# Altium PCB Invertor_1.PcbDoc
Units mm, origin at the board's own origin, x right, y up, seen from the top; angles counter-clockwise.
Board outline 152.4 x 93.73 mm, 2 copper layers (Top Layer, Bottom Layer); 110 components, 60 nets, 328 pads, 0 vias.
Unrouted connection lines stored in the file: 237.
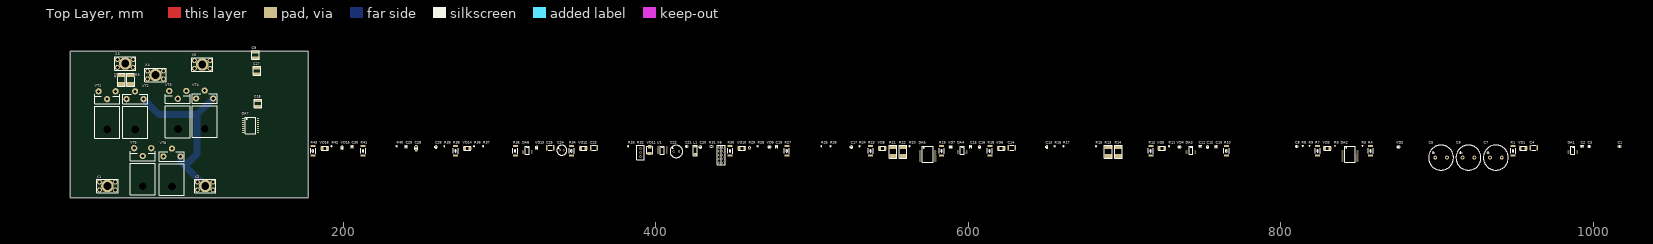
[diagram p0: Top Layer view]
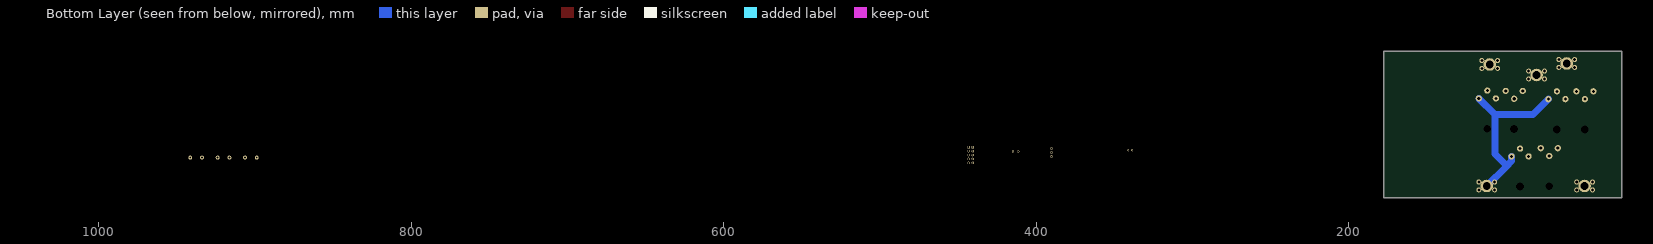
[diagram p1: Bottom Layer view, seen from below]

## Layer stack, top to bottom
Top Solder: solder mask 0.0102, Solder Resist, Dk 3.5
Top Layer: signal copper 0.0356
Dielectric 1: dielectric 0.32, FR-4, Dk 4.8
Bottom Layer: signal copper 0.0356
Bottom Solder: solder mask 0.0102, Solder Resist, Dk 3.5

## Board outline
25.4,25.4 177.8,25.4 177.8,119.126 25.4,119.126

## Design rules (kind name [scope] priority, off if disabled: settings)
Clearance Clearance_1 [InNetClass('Transistor')] p1: gap=1 ignorepadtopadclearanceinfootprint=FALSE
Clearance [All] p2: gap=0.254 ignorepadtopadclearanceinfootprint=FALSE except(0.127: SMDPad-SMDPad; 0.2: Track-Track)
ComponentClearance [All] p1 off: gap=0.254 collisioncheckmode=3 verticalgap=0.254 showdistances=FALSE
Height [All] p1 off: minheight=0 maxheight=25.4 prefheight=12.7
PlaneConnect [All] p1: planeconnectstyle=Direct reliefexpansion=0.508 reliefentries=4 reliefconductorwidth=0.254 reliefairgap=0.254
PolygonConnect [All] p1: connectstyle=Direct reliefconductorwidth=0.254 reliefentries=4 polygonreliefangle="90 Angle" airgapwidth=0.254
RoutingVias [All] p1: holewidth=0.711 width=1.27 viastyle="Through Hole" minholewidth=0.2 minwidth=0.4 maxholewidth=0.711 maxwidth=1.27
SolderMaskExpansion [All] p1: expansion=0.102 istentingtop=FALSE
Width [All] p1: maxlimit=20 minlimit=0.2 preferedwidth=0.254
27 further rules are at their usual default settings.

## Components (designator, comment, footprint, x,y, rotation, side; value= is the part's Value field where it differs from the comment)
C1 "Capacitor" 0805 1016.635,58.42 r0 top value="0.1 мкФ"
C2 "Capacitor" C0603C 992.632,58.547 r0 top value="0.1 мкФ"
C3 "Capacitor" 0805 997.204,58.42 r0 top value="10 мкФ"
C4 "Capacitor" 1812С 961.771,57.531 r0 top value="2.2 мкФ"
C5 "Сapacitor pol" CAP-10 902.462,51.181 r0 top value=470мкФ
C6 "Сapacitor pol" CAP-10 919.988,51.181 r0 top value=470мкФ
C7 "Сapacitor pol" CAP-10 937.514,51.181 r0 top value=470мкФ
C8 "Capacitor" 0805 810.133,58.42 r0 top value="0.47 мкФ"
C9 "Capacitor" 2220С 144.018,116.84 r270 top value="4.7 мкФ"
C10 "Capacitor" C0603C 758.571,58.166 r90 top value="0.1 мкФ"
C11 "Capacitor" C0603C 748.284,58.547 r0 top value="0.1 мкФ"
C12 "Capacitor" 0805 753.11,57.912 r90 top value="10 мкФ"
C13 "Capacitor" 0805 650.24,57.912 r90 top value="0.1 мкФ"
C14 "Capacitor" 1812С 627.888,57.531 r0 top value="2.2 мкФ"
C15 "Capacitor" C0603C 601.599,58.166 r90 top value="0.1 мкФ"
C16 "Capacitor" 0805 607.314,57.912 r90 top value="10 мкФ"
C17 "Capacitor" 0805 525.272,57.912 r90 top value="0.47 мкФ"
C18 "Capacitor" 2220С 145.669,85.725 r270 top value="4.7 мкФ"
C19 "Capacitor" C0603C 477.393,58.166 r90 top value="0.1 мкФ"
C20 "" C0805C 428.752,57.912 r90 top value=10nF
C21 "Capacitor" 0805 419.862,58.42 r0 top value="0.1 мкФ"
C22 "" CAP-8x12 413.258,55.118 r0 top value=220uF
C23 "Capacitor" 1812С 360.553,57.531 r0 top value="2.2 мкФ"
C24 "" CAP-К50-35 339.979,55.88 r0 top value=22uF
C25 "" C1812C 332.613,57.531 r0 top value=2.2uF
C26 "Capacitor" 0805 259.461,57.912 r90 top value="0.47 мкФ"
C27 "Capacitor" 2220С 145.034,106.68 r90 top value="4.7 мкФ"
C28 "Capacitor" C1206C 246.761,57.15 r90 top value=1нф
C29 "Capacitor" C0603C 240.538,58.166 r90 top value="0.1 мкФ"
C30 "Capacitor" C0603C 205.994,58.166 r90 top value="0.1 мкФ"
DA1 "AD623ARZ" SO8 986.79,55.88 r0 top
DA2 "IR2010SPFB" SOIC16 844.169,53.34 r0 top
DA3 "AD623ARZ" SO8 742.442,55.88 r0 top
DA4 "AD623ARZ" SO8 596.138,55.88 r0 top
DA5 "IR2010SPFB" SOIC16 574.04,53.34 r0 top
DA6 "LM393DT" SO8 317.881,55.88 r0 top
DA7 "IR2010SPFB" SOIC16 140.843,71.755 r0 top
L1 "" IND0488-G-E 425.323,53.34 r90 top value=22uH
R1 "Resistor" 2512R 948.563,55.499 r90 top value=100Ом
R2 "Resistor" 2816R 58.293,101.092 r90 top value=20мОм
R3 "Resistor" 2816R 64.135,101.092 r90 top value=20мОм
R4 "Resistor" 2512R 857.377,55.499 r90 top value=43Ом
R5 "Resistor" 0402R 852.17,58.801 r0 top value=11кОм
R6 "Resistor" 0402R 834.644,58.801 r0 top value=10кОм
R7 "Resistor" 2512R 823.468,55.499 r90 top value=20Ом
R8 "Resistor" 0402R 813.943,58.801 r0 top value=20кОм
R9 "Resistor" 0402R 818.261,58.801 r0 top value=10кОм
R10 "Resistor" 2512R 765.175,55.499 r90 top value=43Ом
R11 "Resistor" 0402R 728.472,58.42 r90 top value=10кОм
R12 "Resistor" 2512R 716.788,55.499 r90 top value=20Ом
R13 "Resistor" 2816R 689.61,54.991 r90 top value=20мОм
R14 "Resistor" 2816R 696.087,54.991 r90 top value=20мОм
R15 "Resistor" 0402R 681.736,58.42 r90 top value=11кОм
R16 "Resistor" 0402R 655.447,58.42 r90 top value=10кОм
R17 "Resistor" 0402R 661.035,58.42 r90 top value=10кОм
R18 "Resistor" 2512R 613.791,55.499 r90 top value=100Ом
R19 "Resistor" 2512R 582.93,55.499 r90 top value=43Ом
R20 "Resistor" 0402R 562.483,58.42 r90 top value=10кОм
R21 "Resistor" 2816R 551.815,54.991 r90 top value=20мОм
R22 "Resistor" 2816R 558.292,54.991 r90 top value=20мОм
R23 "Resistor" 2512R 537.591,55.499 r90 top value=20Ом
R24 "Resistor" 0402R 530.479,58.42 r90 top value=11кОм
R25 "Resistor" 0402R 506.095,58.42 r90 top value=10кОм
R26 "Resistor" 0402R 511.937,58.42 r90 top value=10кОм
R27 "Resistor" 2512R 483.997,55.499 r90 top value=43Ом
R28 "Resistor" 0402R 465.455,58.42 r90 top value=10кОм
R29 "" C0805R 460.121,57.531 r90 top value=1.1k
R30 "Resistor" 2512R 447.675,55.499 r90 top value=20Ом
R31 "" C0805R 435.737,58.42 r0 top value=9.1k
R32 "pot" 3296W 390.398,54.483 r90 top
R33 "Resistor" 0402R 382.524,58.42 r90 top value=75кОм
R34 "Resistor" 2512R 346.202,55.499 r90 top value=100Ом
R35 "Resistor" 2512R 310.261,55.499 r90 top value=43Ом
R36 "Resistor" 0402R 283.972,58.42 r90 top value=10кОм
R37 "Resistor" 0402R 289.814,58.42 r90 top value=2.2кОм
R38 "Resistor" 2512R 272.034,55.499 r90 top value=20Ом
R39 "Resistor" 0402R 264.922,58.42 r90 top value=2.2кОм
R40 "Resistor" 0402R 234.442,58.42 r90 top value=2.2кОм
R41 "Resistor" 2512R 212.852,55.499 r90 top value=43Ом
R42 "Resistor" 0402R 192.786,58.42 r90 top value=10кОм
R43 "Resistor" 2512R 180.848,55.499 r90 top value=20Ом
U1 "LM22675MR-5.0" LM22675MR-5.0/NOPB 404.368,55.753 r0 top
VD1 "STPS2H100A" D0-124AC 954.913,57.15 r0 top
VD2 "BZX384-C18" SOD323 875.284,58.039 r0 top
VD3 "VS-10BQ040" D0-124AC 829.691,57.15 r0 top
VD4 "BZX384-C18" SOD323 735.076,58.039 r0 top
VD5 "VS-10BQ040" D0-124AC 723.9,57.15 r0 top
VD6 "STPS2H100A" D0-124AC 621.03,57.15 r0 top
VD7 "BZX384-C18" SOD323 588.772,58.039 r0 top
VD8 "VS-10BQ040" D0-124AC 545.084,57.15 r0 top
VD9 "BZX384-C18" SOD323 472.821,58.039 r0 top
VD10 "VS-10BQ040" D0-124AC 455.168,57.15 r0 top
VD11 "" DO-214AA 396.24,56.007 r90 top
VD12 "STPS2H100A" D0-124AC 353.695,57.15 r0 top
VD13 "BZX384-C18" SOD323 323.977,57.531 r90 top
VD14 "VS-10BQ040" D0-124AC 279.527,57.15 r0 top
VD15 "BZX384-C18" SOD323 199.517,57.531 r90 top
VD16 "VS-10BQ040" D0-124AC 188.341,57.15 r0 top
VT1 "IRFP4710PBF" TO247-2 49.099,88.565 r180 top
VT2 "IRFP4710PBF" TO247-1 67.006,88.565 r180 top
VT3 "IRFP4710PBF" TO247-2 94.311,88.819 r180 top
VT4 "IRFP4710PBF" TO247-1 111.506,89.027 r180 top
VT5 "IRFP4710PBF" TO247-2 71.882,52.197 r180 top
VT6 "IRFP4710PBF" TO247-1 90.54,51.943 r180 top
X1 "Connector-1" PCBM4 49.276,33.02 r180 top
X2 "Connector-1" PCBM4 111.887,33.02 r180 top
X3 "Connector-1_1" PCBM4 60.706,111.379 r0 top
X4 "Connector-1_1" PCBM4 80.01,104.013 r0 top
X5 "Connector-1_1" PCBM4 109.982,110.744 r180 top
X6 "PLS-2x5" PLS-2x5 443.357,52.832 r90 top

## Footprints (in the part's own frame and the unit in brackets; to place one, negate y for a bottom-side part, rotate by r counter-clockwise, add the part's x,y. Pads: shape width x height; smd on the part's side, far side on the other; paste and mask are expansions set on the pad)
0402R [mm]
  rect 0.4x0.6 smd: 1(-0.5,0) 2(0.5,0)
  silkscreen extent -0.2,-0.3 0.2,0.3, body extent -0.52,-0.3 0.52,0.3, height 0.34
0805 [mm]
  rect 0.6x1.3 smd: 1(-0.875,0) 2(0.875,0)
  silkscreen extent -0.4,-0.7 0.4,0.7, body extent -1,-0.6 1,0.6, height 0.8
1812С [mm]
  rect 1x3.35 smd: 1(-2.175,0) 2(2.175,0)
  silkscreen extent -1.3,-1.58 1.3,1.58, body extent -2.25,-1.6 2.25,1.6, height 1
2220С [mm]
  rect 1.8x5 smd: 1(-1.9,0) 2(1.9,0)
  silkscreen extent -2.8,-2.5 2.8,2.5
2512R [mm]
  rect 1.2x3.2 smd: 1(-3,0) 2(3,0)
  silkscreen extent -1.73,-1.63 1.75,1.63, body extent -3.2,-1.6 3.2,1.6, height 0.55
2816R [mm]
  rect 2.45x4.7 smd: 1(-2.825,0) 2(2.825,0)
  silkscreen extent -4.2,-2.5 4.2,2.5
3296W [mm]
  round 1.5 hole 0.8: 1(2.54,0) 2(0,0) 3(-2.54,0)
  silkscreen extent -4.77,-2.45 4.72,2.37, body extent -4.77,-2.43 4.76,2.4, height 11.52
C0603C [mm]
  rect 0.5x0.8 smd: 1(-0.7,0) 2(0.7,0)
  silkscreen extent -0.97,-0.58 0.97,0.58, body extent -0.8,-0.4 0.8,0.4, height 0.5
C0805C [mm]
  rect 0.6x1.3 smd: 1(-0.875,0) 2(0.875,0)
  silkscreen extent -0.4,-0.7 0.4,0.7, body extent -1,-0.6 1,0.6, height 0.8
C0805R [mm]
  rect 0.6x1.3 smd: 1(-0.875,0) 2(0.875,0)
  silkscreen extent -0.4,-0.7 0.4,0.7, body extent -1,-0.6 1,0.6, height 0.5
C1206C [mm]
  rect 0.8x1.7 smd: 1(-1.6,0) 2(1.6,0)
  silkscreen extent -1,-0.9 1,0.9, body extent -1.7,-0.8 1.7,0.8, height 0.8
C1812C [mm]
  rect 1x3.35 smd: 1(-2.175,0) 2(2.175,0)
  silkscreen extent -1.3,-1.58 1.3,1.58, body extent -2.25,-1.6 2.25,1.6, height 1
CAP-8x12 [mm]
  round 1.3 hole 0.8: 1(-1.75,0) 2(1.75,0)
  silkscreen extent -4,-4 4,4
CAP-10 [mm]
  round 2.5 hole 1.2: 1(-3.75,0) 2(3.75,0)
  silkscreen extent -8,-8 8,8
CAP-К50-35 [mm]
  round 1.3 hole 0.8: 1(-1.25,0) 2(1.25,0)
  silkscreen extent -3.2,-3.2 3.2,3.2
D0-124AC [mm]
  rect 1.8x2.2 smd: A(1.8,0) C(-1.8,0)
  silkscreen extent -2.25,-1.4 2.25,1.4, body extent -2.47,-1.4 2.47,1.4, height 2.4
DO-214AA [mm]
  rect 2x2.5 smd: A(2.1,0) C(-2.1,0)
  silkscreen extent -2.5,-1.9 2.5,1.9, body extent -2.97,-1.8 2.97,1.8, height 2.3
IND0488-G-E [mm]
  rect 1.5x2.2 smd: 1(0,0) 2(4.9,0)
  silkscreen extent -0.89,-1.27 5.71,1.27
LM22675MR-5.0/NOPB [mm]
  rrect50% 1.2x0.6 smd: 1(-2.858,2.086) 2(-2.858,0.816) 3(-2.858,-0.454) 4(-2.858,-1.724) 5(2.73,-1.724) 6(2.73,-0.454) 7(2.73,0.816) 8(2.73,2.086)
  silkscreen extent -1.29,-2.36 1.25,2.72, body extent -3.13,-2.26 3,2.63, height 1.76
PCBM4 [mm]
  round 3.2 hole 2: 1(-5.05,-2.5) 1(-5.05,2.5) 1(5.05,-2.5) 1(5.05,2.5)
  round 8 hole 5: 1(0,0)
  Top Layer region: -5.3,7.2
  Top Layer region: -5.3,7.2
  silkscreen extent -6.8,-4.2 6.8,4.2
PLS-2x5 [mm]
  rect 1.6x1.6 hole 1.1: 1(5.08,0) 6(5.08,2.7)
  round 1.6 hole 1.1: 2(2.54,0) 3(0,0) 4(-2.54,0) 5(-5.08,0) 7(2.54,2.7) 8(0,2.7) 9(-2.54,2.7) 10(-5.08,2.7)
  silkscreen extent -6.35,-1.27 6.35,3.97, body extent -6.35,-1.27 6.35,3.97, height 8.5
SO8 [mm]
  rrect50% 1.2x0.6 smd: 1(-2.794,1.905) 2(-2.794,0.635) 3(-2.794,-0.635) 4(-2.794,-1.905) 5(2.794,-1.905) 6(2.794,-0.635) 7(2.794,0.635) 8(2.794,1.905)
  silkscreen extent -1.23,-2.55 1.31,2.53, body extent -3.07,-2.44 3.07,2.45, height 1.76
SOD323 [mm]
  rrect25% 0.6x0.7 smd: A(1.25,0) C(-1.25,0)
  silkscreen extent -0.9,-0.7 0.9,0.7, body extent -1.3,-0.68 1.3,0.68, height 1.1
SOIC16 [mm]
  rrect50% 1.5x0.6 smd: 1(-4.75,4.445) 2(-4.75,3.175) 3(-4.75,1.905) 4(-4.75,0.635) 5(-4.75,-0.635) 6(-4.75,-1.905) 7(-4.75,-3.175) 8(-4.75,-4.445) 9(4.75,-4.445) 10(4.75,-3.175) 11(4.75,-1.905) 12(4.75,-0.635) 13(4.75,0.635) 14(4.75,1.905) 15(4.75,3.175) 16(4.75,4.445)
  silkscreen extent -3.4,-5.25 3.4,5.25, body extent -5.16,-5.25 5.16,5.25, height 2.65
TO247-1 [mm]
  round 4 hole 5 unplated: 4(-0.05,19.35)
  round 4 hole 2: D(0,-5) G(5.45,0) S(-5.45,0)
  silkscreen extent -8,-3 8,24.9, body extent -7.5,-5.2 7.5,3, height 26.15
TO247-2 [mm]
  round 4 hole 5 unplated: 4(-0.05,19.35)
  round 4 hole 2: D(0,0) G(5.45,-5) S(-5.45,-5)
  silkscreen extent -8,-3 8,24.9, body extent -7.5,-5.2 7.5,3, height 26.15

## Part data
C20 C25: library part Cap, ComponentLink1Description="New link"
  C20: ComponentLink1URL=https://www.chipdip.ru/product/grm216r71h103k
  C25: ComponentLink1URL=https://www.chipdip.ru/product0/9000144596
C22 C24: library part CapPol, ComponentLink1Description="New link"
  C22: ComponentLink1URL=https://www.chipdip.ru/product0/9000565758
  C24: ComponentLink1URL=https://www.chipdip.ru/product0/9000565851
DA1 DA3 DA4: library part AD623ARZ-R7, ComponentLink1Description="Product link", ComponentLink1URL=https://www.platan.ru/cgi-bin/qwery.pl/id=2010029983, Datasheet=https://doc.platan.ru/pdf/datasheets/analogdevices/AD623-877194.pdf
DA6: library part Comparator, ComponentLink1Description="Product link", ComponentLink1URL=https://www.chipdip.ru/product/lm393d-stm
L1: library part Inductor, ComponentLink1Description="New link", ComponentLink1URL=https://www.chipdip.ru/product/b82472g6223m000-22
R1 R4 R7 R10 R12 R18 R19 R23 R27 R30 R34 R35 R38 R41 R43: Power=1Вт, ComponentLink1Description="Product link"
  R1 R18 R34: ComponentLink1URL=https://www.chipdip.ru/product0/9000189977
  R4 R10 R19 R27 R35 R41: ComponentLink1URL=https://www.chipdip.ru/product0/9000190080
  R7 R12 R23 R30 R38 R43: ComponentLink1URL=https://www.chipdip.ru/product0/9000190063
R2 R3 R13 R14 R21 R22: Power=2В, ComponentLink1Description="Product link", ComponentLink1URL=https://www.platan.ru/cgi-bin/qwery.pl/id=224066896
R6 R8 R9 R11 R16 R17 R20 R25 R26 R28 R33 R36 R37 R39 R40 R42: Power=0.062, ComponentLink1Description="Product link"
  R6 R8 R9 R11 R16 R17 R20 R25 R26 R28 R36 R42: ComponentLink1URL=https://www.chipdip.ru/product0/9000189664
  R33: ComponentLink1URL=https://www.chipdip.ru/product0/9000189752
  R37 R39 R40: ComponentLink1URL=https://www.chipdip.ru/product0/9000189810
R29 R31: library part res, ComponentLink1Description="New link"
  R29: ComponentLink1URL=https://www.chipdip.ru/product0/9000079487
  R31: ComponentLink1URL=https://www.chipdip.ru/product0/9000079513
U1: library part LM22675MR-5.0/NOPB, ComponentLink1Description="New link", ComponentLink1URL=https://www.chipdip.ru/product/lm22675mr-5.0-nopb-2
VD1 VD6 VD12: library part "Bootstrap diode", ComponentLink1Description="Product link", ComponentLink1URL=https://www.chipdip.ru/product/stps2h100a-2
VD2 VD4 VD7 VD9 VD13 VD15: library part "Zener diode", ComponentLink1Description="Product link", ComponentLink1URL=https://www.chipdip.ru/product/bzx384-c18.115
VD3 VD5 VD8 VD10 VD14 VD16: library part Shotki, ComponentLink1Description="Product link", ComponentLink1URL=https://www.chipdip.ru/product/10bq040
VD11: library part DIODE, ComponentLink1Description="New link", ComponentLink1URL=https://www.chipdip.ru/product/sk16-diotec
VT1 VT2 VT3 VT4 VT5 VT6: library part N-MOSFET, ComponentLink1Description="Product link", ComponentLink1URL=https://www.chipdip.ru/product/irfp4710pbf
C1 C13 C21: ComponentLink1Description="Product link", ComponentLink1URL=https://www.chipdip.ru/product/grm219f51h104z
C2 C10 C11 C15 C19 C29 C30: ComponentLink1Description="Product link", ComponentLink1URL=https://www.chipdip.ru/product0/9000591947
C3 C12 C16: ComponentLink1Description="Product link", ComponentLink1URL=https://www.chipdip.ru/product0/9000671061
C4 C14 C23: ComponentLink1Description="Product link", ComponentLink1URL=https://www.chipdip.ru/product0/9000144596
C5 C6 C7: ComponentLink1Description="Product link", ComponentLink1URL=https://www.chipdip.ru/product0/9000565913
C8 C17 C26: ComponentLink1Description="Product link", ComponentLink1URL=https://www.chipdip.ru/product/grm21bf51e474z
C9 C18 C27: ComponentLink1Description="Product link", ComponentLink1URL=https://www.chipdip.ru/product0/8001641628
C28: ComponentLink1Description="Product link", ComponentLink1URL=https://www.chipdip.ru/product/grm319r71h102k
DA2 DA5 DA7: ComponentLink1Description="Product link", ComponentLink1URL=https://www.chipdip.ru/product/ir2010s
R5 R15 R24: ComponentLink1Description="Product link", ComponentLink1URL=https://www.chipdip.ru/product0/9000189841
R32: ComponentLink1Description="Product link", ComponentLink1URL=https://www.chipdip.ru/product/3296w-1-103
X1: ComponentLink1Description="Product link", Name=+АКБ
X2: ComponentLink1Description="Product link", Name=GND
X3: ComponentLink1Description="Product link", Name="Фаза А"
X4: ComponentLink1Description="Product link", Name="Фаза B"
X5: ComponentLink1Description="Product link", Name="Фаза C"
X6: ComponentLink1Description="Product link"

## Nets (pads, with @x,y where several pads share a name; then routed paths per layer and width w, separated by ;. In a path a pad name is that pad's centre, name@x,y a point inside that pad or via, vN(x,y) a via of type N, cw(c..) or ccw(c..) an arc to the next point about the centre after c; other vN are vias at no path point)
+3.3: C10.2 C19.2 C30.2 DA2.11 DA5.11 DA7.11 R17.2 R26.2 R33.2
+5: C2.2 C3.2 C11.2 C12.2 C15.2 C16.2 C29.1 DA1.7 DA3.7 DA4.7 DA6.8 R9.2 R32.1
+12: C8.2 C17.2 C22.1 C26.2 DA2.3 DA5.3 DA7.3 L1.2 R1.2 R18.2 R31.2 R34.2
+VM: C5.1 C6.1 C7.1 C9.2 C18.2 C24.1 C25.1 C27.2 U1.7 VT1.D VT3.D VT5.D X1.1
AH: DA2.12 X6.1
AL: DA2.14 X6.6
BH: DA5.12 X6.2
BL: DA5.14 X6.7
CH: DA7.12 X6.3
CL: DA7.14 X6.8
Current_A_out: DA1.6 X6.4
Current_B_out: DA3.6 X6.5
Current_C_out: DA4.6 X6.9
GND: C2.1 C3.1 C10.1 C11.1 C12.1 C15.1 C16.1 C19.1 C28.1 C29.2 C30.1 DA1.4 DA2.15 DA3.4 DA4.4 DA5.15 DA6.4 DA7.15 R8.1 R16.1 R25.1 R32.3
I_A: C1.1 C4.2 DA1.3 DA2.6 R2.1 R3.1 R6.2 R37.1 VT1.S VT2.D
I_B: C13.1 C14.2 DA3.3 DA5.6 R13.1 R14.1 R20.2 R39.1 VT3.S VT4.D
I_C: C21.1 C23.2 DA4.3 DA7.6 R21.1 R22.1 R36.2 R40.1 VT5.S VT6.D
NetC1_2: C1.2 C4.1 DA2.7 VD1.C
NetC13_2: C13.2 C14.1 DA5.7 VD6.C
NetC20_1: C20.1 U1.1
NetC20_2: C20.2 L1.1 U1.8 VD11.C
NetC21_2: C21.2 C23.1 DA7.7 VD12.C
NetC28_2: C28.2 DA6.3 R33.1 R37.2 R39.2 R40.2
NetDA1_1: DA1.1 R5.2
NetDA1_5: DA1.5 R8.2 R9.1
NetDA1_8: DA1.8 R5.1
NetDA2_1: DA2.1 R10.2 R12.2
NetDA2_8: DA2.8 R4.2 R7.2
NetDA3_1: DA3.1 R15.2
NetDA3_5: DA3.5 R16.2 R17.1
NetDA3_8: DA3.8 R15.1
NetDA4_1: DA4.1 R24.2
NetDA4_5: DA4.5 R25.2 R26.1
NetDA4_8: DA4.8 R24.1
NetDA5_1: DA5.1 R27.2 R30.2
NetDA5_8: DA5.8 R19.2 R23.2
NetDA6_2: DA6.2 R32.2
NetDA7_1: DA7.1 R41.2 R43.2
NetDA7_8: DA7.8 R35.2 R38.2
NetR1_1: R1.1 VD1.A
NetR4_1: R4.1 R6.1 VD2.C VD3.A VT1.G
NetR7_1: R7.1 VD3.C
NetR10_1: R10.1 R11.1 VD4.C VD5.A VT2.G
NetR12_1: R12.1 VD5.C
NetR18_1: R18.1 VD6.A
NetR19_1: R19.1 R20.1 VD7.C VD8.A VT3.G
NetR23_1: R23.1 VD8.C
NetR27_1: R27.1 R28.1 VD9.C VD10.A VT4.G
NetR29_2: R29.2 R31.1 U1.4
NetR30_1: R30.1 VD10.C
NetR34_1: R34.1 VD12.A
NetR35_1: R35.1 R36.1 VD13.C VD14.A VT5.G
NetR38_1: R38.1 VD14.C
NetR41_1: R41.1 R42.1 VD15.C VD16.A VT6.G
NetR43_1: R43.1 VD16.C
OutA: DA1.2 R2.2 R3.2 X3.1
OutB: DA3.2 R13.2 R14.2 X4.1
OutC: DA4.2 R21.2 R22.2 X5.1
Overcurrent_signal: DA2.13 DA5.13 DA6.1 DA7.13 X6.10
Power_GND: C5.2 C6.2 C7.2 C8.1 C9.1 C17.1 C18.1 C22.2 C24.2 C25.2 C26.1 C27.1 DA2.2 DA5.2 DA7.2 R11.2 R28.2 R29.1 R42.2 U1.6 VD2.A VD4.A VD7.A VD9.A VD11.A VD13.A VD15.A VT2.S VT4.S VT6.S X2.1 | length 114.3
  Bottom Layer w4.5: VT2.S 82.398,78.623 106.552,78.623 ; VT6.S 95.99,48.917 98.996,45.91 ; X2.1@111.887,33.02 98.996,45.91 ; VT4.S 106.552,78.623 ; 98.996,45.91 106.552,53.466 106.552,78.623
pads on no net: DA2.4 DA2.5 DA2.9 DA2.10 DA2.16 DA5.4 DA5.5 DA5.9 DA5.10 DA5.16 DA6.5 DA6.6 DA6.7 DA7.4 DA7.5 DA7.9 DA7.10 DA7.16 U1.2 U1.3 U1.5 VT1.4 VT2.4 VT3.4 VT4.4 VT5.4 VT6.4